# Altium PCB can.PcbDoc
Units mil, origin at the board's own origin, x right, y up, seen from the top; angles counter-clockwise.
Board outline 1875 x 875 mil, 2 copper layers (Top Layer, Bottom Layer); 22 components, 17 nets, 77 pads, 42 vias.
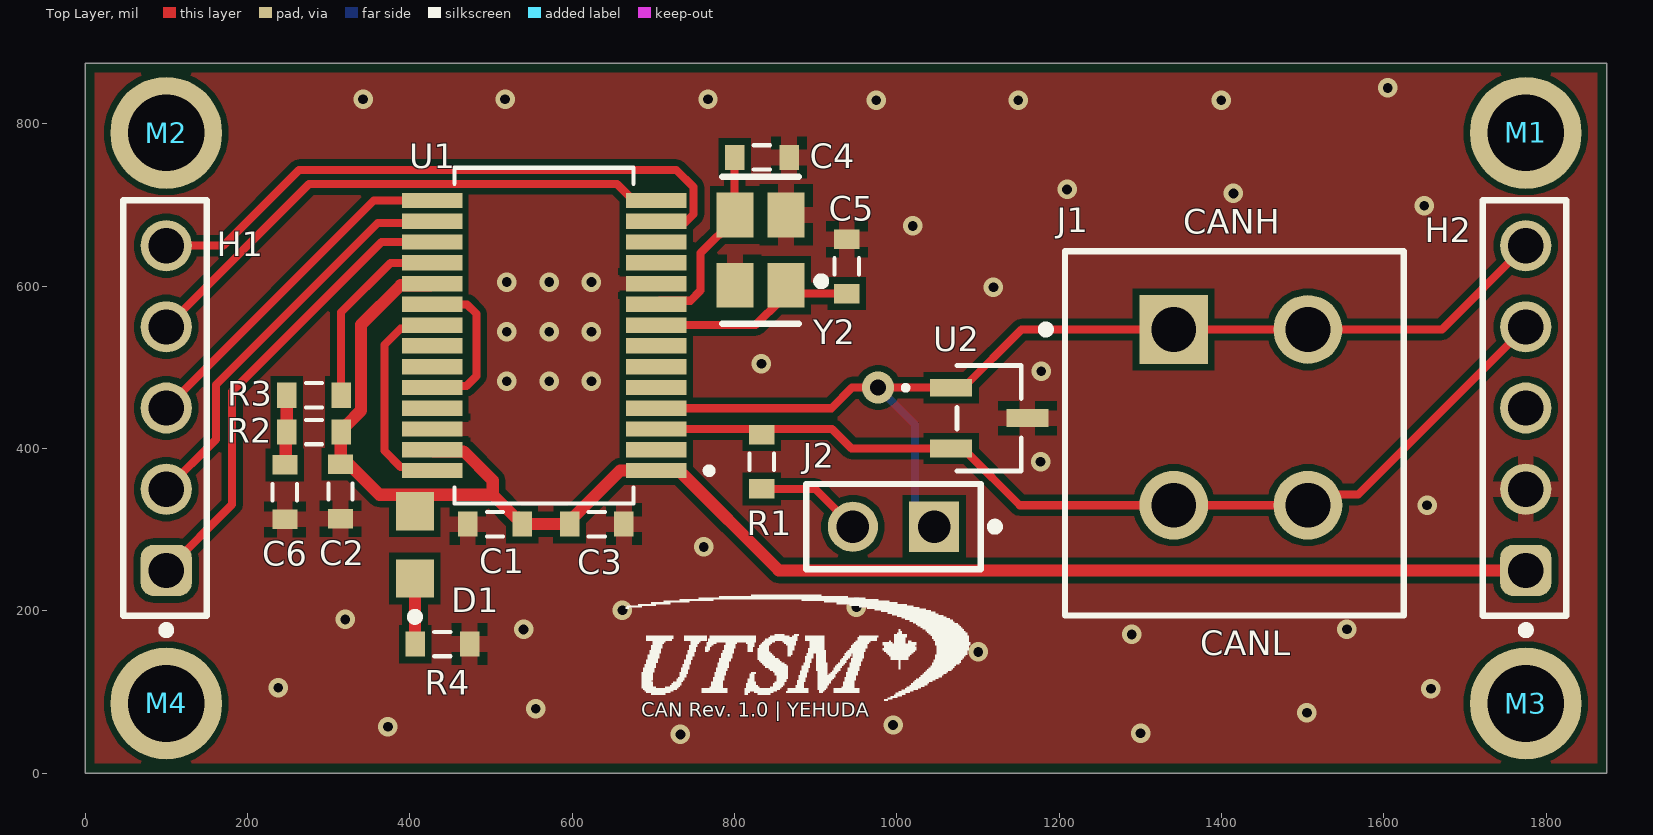
[diagram p0: Top Layer view]
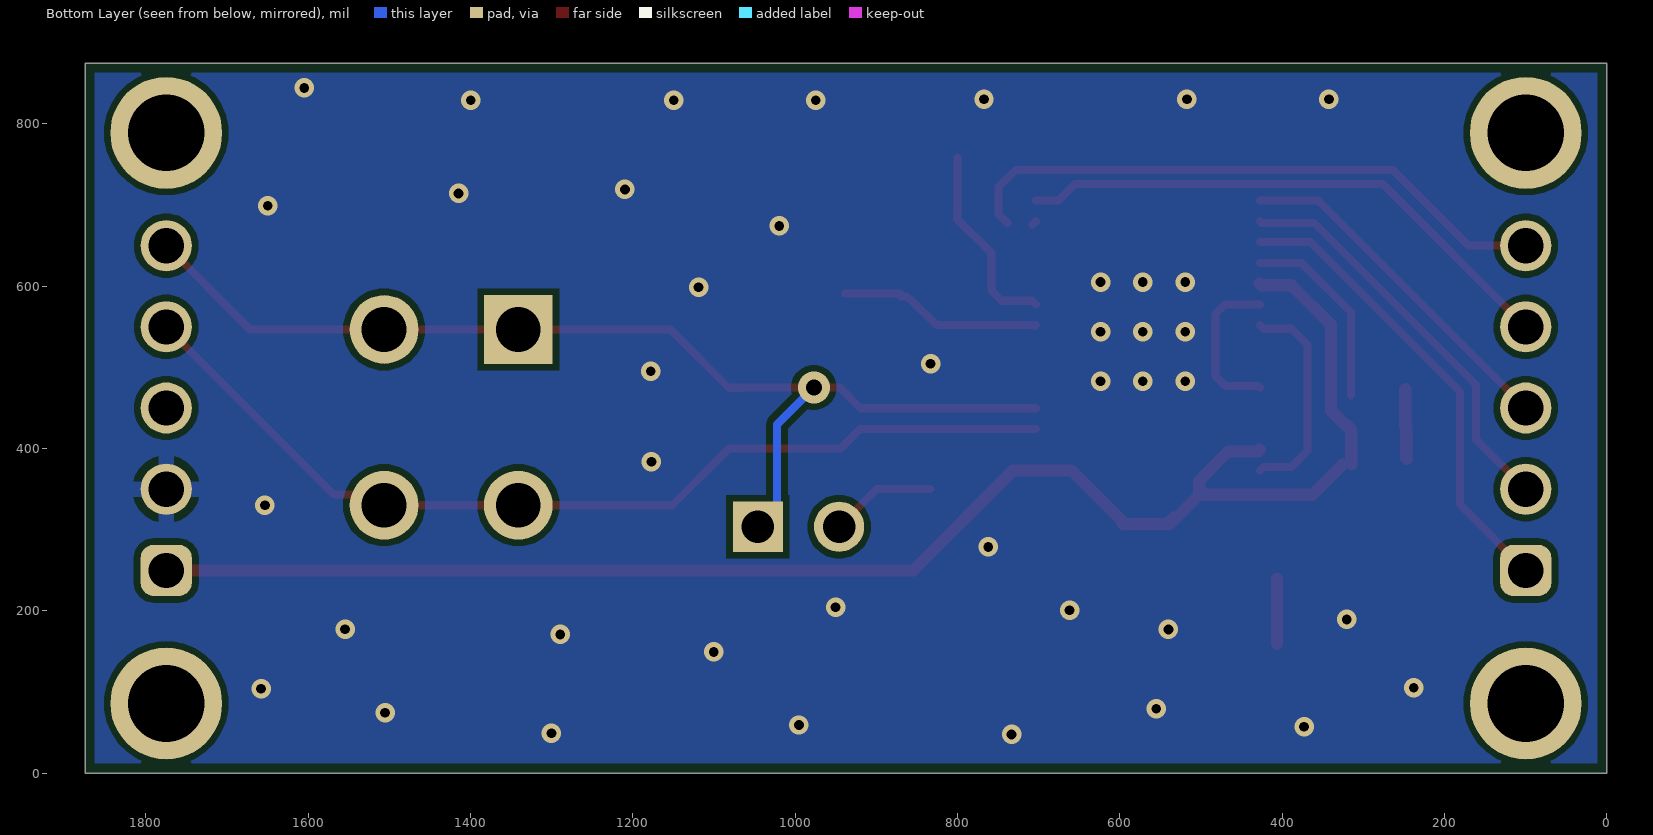
[diagram p1: Bottom Layer view, seen from below]
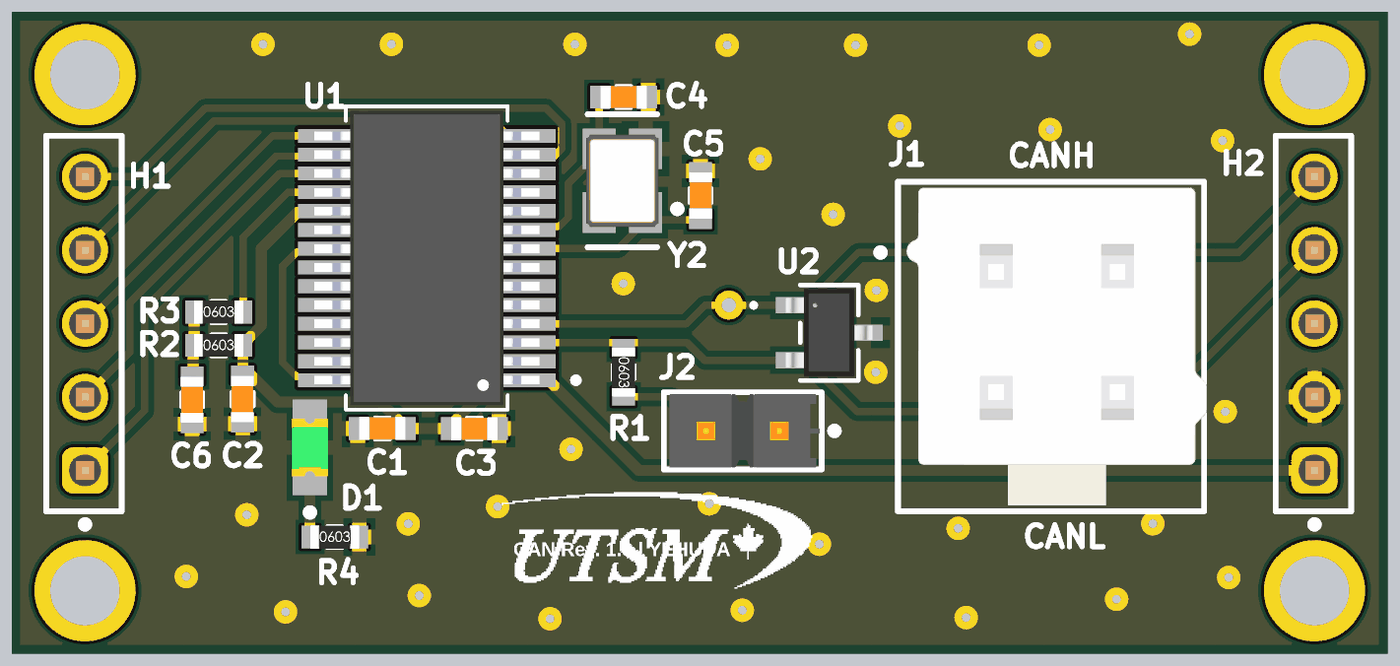
[diagram p2: 3D render of the assembled board from above, using the file's embedded part models]

## Layer stack, top to bottom
Top Solder: solder mask 0.4, Solder Resist, Dk 3.5
Top Layer: signal copper 1.4
Dielectric 1: dielectric 12.6, FR-4, Dk 4.8
Bottom Layer: signal copper 1.4
Bottom Solder: solder mask 0.4, Solder Resist, Dk 3.5

## Board outline
0,0 1875,0 1875,875 0,875

## Design rules (kind name [scope] priority, off if disabled: settings)
BoardOutlineClearance [All] p1: gap=11.81 ignorepadtopadclearanceinfootprint=FALSE except(15.75: Arc-SplitBarrior Arc-SplitContinuation Track-SplitBarrior Track-SplitContinuation SMDPad-SplitBarrior SMDPad-SplitContinuation THPad-SplitBarrior THPad-SplitContinuation Via-SplitBarrior Via-SplitContinuation Fill-SplitBarrior Fill-SplitContinuation Poly-SplitBarrior Poly-SplitContinuation Region-SplitBarrior Region-SplitContinuation Text-SplitBarrior Text-SplitContinuation)
Clearance "Clearance Different Nets" [All] p1: gap=7.87 ignorepadtopadclearanceinfootprint=FALSE except(3.5: Arc-Arc Arc-Track Arc-SMDPad Track-Track Track-SMDPad; 5: SMDPad-SMDPad SMDPad-Via THPad-Via Via-Via; 10: Arc-Via Arc-Text Track-Via Track-Text SMDPad-Text THPad-Text Via-Text Fill-Text Poly-Text Region-Text Text-Text; 19.68: THPad-THPad Via-Hole)
Clearance "Clearance Same Nets" [All] p2: gap=7.87 ignorepadtopadclearanceinfootprint=FALSE except(3.5: Arc-Arc Arc-Track Arc-SMDPad Track-Track Track-SMDPad SMDPad-SMDPad; 5: SMDPad-Via THPad-Via; 10: Arc-Via Arc-Text Track-Via Track-Text SMDPad-Text THPad-Text Via-Via Via-Text Fill-Text Poly-Text Region-Text Text-Text)
Clearance "Clearance Bottom Layer" [OnLayer('Bottom Layer')] p3: gap=8 ignorepadtopadclearanceinfootprint=TRUE except(10: Arc-Text Track-Text SMDPad-Text THPad-Text Via-Text Fill-Text Poly-Text Region-Text Text-Text)
Clearance "Clearance Top Layer" [OnLayer('Top Layer')] p4: gap=8 ignorepadtopadclearanceinfootprint=TRUE except(10: Arc-Text Track-Text SMDPad-Text THPad-Text Via-Text Fill-Text Poly-Text Region-Text Text-Text)
HoleSize [All] p1: absolutevalues=TRUE maxlimit=248.03 minlimit=7.87 maxpercent=80.000 minpercent=20.000
MinimumAnnularRing [All] p1: minimumring=5.12
MinimumSolderMaskSliver [All] p1: minsoldermaskwidth=3.94
PolygonConnect PolygonConnect_1 [All] p1: thpad.connectstyle=Relief thpad.reliefconductorwidth=20 thpad.reliefentries=4 thpad.polygonreliefangle="90 Angle" thpad.airgapwidth=10 smdpad.connectstyle=Relief smdpad.reliefconductorwidth=20 smdpad.reliefentries=4 smdpad.polygonreliefangle="90 Angle" smdpad.airgapwidth=10 via.connectstyle=Direct via.reliefconductorwidth=20 via.reliefentries=4 via.polygonreliefangle="90 Angle" via.airgapwidth=10
RoutingCorners [All] p1: cornerstyle=Round minsetback=100 maxsetback=100
RoutingVias [All] p1: holewidth=19.68 width=39.37 viastyle="Through Hole" minholewidth=7.87 minwidth=13.78 maxholewidth=39.37 maxwidth=78.74
SilkToSilkClearance [All] p1: silktosilkclearance=3.94
SilkToSolderMaskClearance [IsPad] p1: minsilkscreentomaskgap=3.94 clearancetoexposedcopper=TRUE
SolderMaskExpansion [All] p1: expansion=4 istentingtop=FALSE
SupplyNets "Schematic Supply Nets_1" [InNet('GND')] p1: voltage=0.000
SupplyNets "Schematic Supply Nets" [InNet('+5')] p2: voltage=0.000
Width [All] p1: maxlimit=100 minlimit=3.5 preferedwidth=15
25 further rules are at their usual default settings.

## Components (designator, comment, footprint, x,y, rotation, side; value= is the part's Value field where it differs from the comment)
C1 "Cap" 0603C 505.11,306.93 r0 top value=0.1uF
C2 "Cap" 0603C 314.69,347.11 r90 top value=0.1uF
C3 "Cap" 0603C 630.4,306.93 r180 top value=0.1uF
C4 "" 0603C 833.82,758.74 r180 top value=22pF
C5 "Cap" 0603C 938.51,624.5 r270 top value=22pF
C6 "Cap" 0603C 246.14,346.33 r90 top value=0.1uF
D1 "LTST-C171GKT" FP-LTST-C171GKT-MFG 406.4,281.3 r90 top
H1 "61300511121" 61300511121 100,450 r90 top
H2 "61300511121" 61300511121 1775,450 r90 top
J1 "1x4_FEMALE_VERT_THT" FP-0039281043-MFG 1423.92,446.4 r0 top
J2 "TSW-102-07-F-S" FP-TSW-102-07-F-S-MFG 996.03,303.77 r180 top
M1 "PTH-M2D5X5" PTH-M2D5X5#1 1775,794.7 r0 top
M2 "PTH-M2D5X5" PTH-M2D5X5#2 100,789.68 r0 top
M3 "PTH-M2D5X5" PTH-M2D5X5#3 1775,246.8 r0 top
M4 "PTH-M2D5X5" PTH-M2D5X5#3 100,246.8 r0 top
R1 "Res3" 0603R 833.7,383.76 r270 top value=120
R2 "Res3" 0603R 281.99,420.4 r0 top value=10k
R3 "Res3" 0603R 281.99,465.71 r0 top value=10k
R4 "Res3" 0603r 440.2,159.2 r0 top value=300
U1 "MCP25625-E/SS" SOP65P780X200-28N 565.66,539.32 r180 top
U2 "ESDCAN01-2BLY" SOT_01-2BLY_STM 1113.95,437.54 r270 top
Y2 "TSX-3225 16.0000MF09Z-AC0" FP-TSX-3225-MFG 832.13,644.57 r90 top

## Footprints (in the part's own frame and the unit in brackets; to place one, negate y for a bottom-side part, rotate by r counter-clockwise, add the part's x,y. Pads: shape width x height; smd on the part's side, far side on the other; paste and mask are expansions set on the pad)
0603C [mil]
  rect 24x31 smd: 1(-33.5,0) 2(33.5,0)
  silkscreen extent -10,-15 10,15, body extent -31,-15 31,16, height 31
0603R [mil]
  rect 24x31 smd: 1(-33.5,0) 2(33.5,0)
  silkscreen extent -10,-15 10,15, body extent -33,-16 33,16, height 22
0603r [mil]
  rect 24x31 smd: 1(-33.5,0) 2(33.5,0)
  silkscreen extent -10,-15 10,15, body extent -33,-16 33,16, height 22
61300511121 [mm] "Pin Header, pitch 2.54 mm, THT, Vertical, single row, 5p"
  rrect50% 1.6x1.6 hole 1.1: 1(-5.08,0)
  round 1.6 hole 1.1: 2(-2.54,0) 3(0,0) 4(2.54,0) 5(5.08,0)
  silkscreen extent -7.07,-1.27 6.5,1.35, body extent -6.35,-1.27 6.35,1.27, height 8.57
FP-0039281043-MFG [mm]
  rect 2.15x2.15 hole 1.4 paste-2539.97 mask+0: 1(-2.1,2.55)
  round 2.15 hole 1.4 paste-2539.97 mask+0: 2(2.1,2.55) 3(-2.1,-2.95) 4(2.1,-2.95)
  silkscreen extent -6.22,-6.4 5.1,5, body extent -5.6,-6.5 5.8,5.1, height 0.25
FP-LTST-C171GKT-MFG [mm]
  rect 1.2x1.2 smd paste+0 mask+0: 1(-1.05,0) 2(1.05,0)
  silkscreen extent -2.37,-0.13 -2.13,0.12, body extent -1.75,-0.77 1.75,0.77, height 0.25
FP-TSW-102-07-F-S-MFG [mm]
  rect 1.57x1.57 hole 1.02 paste-2539.97 mask+0: 1(-1.27,0)
  round 1.57 hole 1.02 paste-2539.97 mask+0: 2(1.27,0)
  silkscreen extent -3.3,-1.34 2.73,1.34, body extent -2.83,-1.44 2.83,1.44, height 0.25
FP-TSX-3225-MFG [mm]
  rect 1.4x1.15 smd paste+0 mask+0: 1(-1.1,-0.8) 2(1.1,-0.8) 3(1.1,0.8) 4(-1.1,0.8)
  silkscreen extent -2.3,-2.02 2.3,1.2, body extent -1.9,-1.48 1.9,1.48, height 0.25
PTH-M2D5X5#1 [mm]
  round 3.5 hole 2.4: 1(0,-0.145)
PTH-M2D5X5#2 [mm]
  round 3.5 hole 2.4: 1(0,-0.017)
PTH-M2D5X5#3 [mm]
  round 3.5 hole 2.4: 1(0,-4.084)
SOP65P780X200-28N [mm]
  rect 1.9x0.48 smd paste+0 mask+0.127: 1(-3.505,4.225) 2(-3.505,3.575) 3(-3.505,2.925) 4(-3.505,2.275) 5(-3.505,1.625) 6(-3.505,0.975) 7(-3.505,0.325) 8(-3.505,-0.325) 9(-3.505,-0.975) 10(-3.505,-1.625) 11(-3.505,-2.275) 12(-3.505,-2.925) 13(-3.505,-3.575) 14(-3.505,-4.225) 15(3.505,-4.225) 16(3.505,-3.575) 17(3.505,-2.925) 18(3.505,-2.275) 19(3.505,-1.625) 20(3.505,-0.975) 21(3.505,-0.325) 22(3.505,0.325) 23(3.505,0.975) 24(3.505,1.625) 25(3.505,2.275) 26(3.505,2.925) 27(3.505,3.575) 28(3.505,4.225)
  silkscreen extent -5.26,-5.25 2.8,5.25, body extent -3.9,-5.1 3.9,5.1, height 2
SOT_01-2BLY_STM [mil]
  rect 22x52 smd paste+0 mask+0: 1(-37.4,-47) 2(37.4,-47) 3(0,47)
  silkscreen extent -65,-106 65,40, body extent -60,-59 60,59, height 49

## Part data
C1: "0603 Capacitor", LatestRevisionDate=17-Jul-2002, LatestRevisionNote="Re-released for DXP Platform.", PackageDescription="Radial Cap, Thru-Hole; 2 Leads; 0.3 in Pin Spacing", PackageReference=RAD-0.3, Published=8-Jun-2000, Publisher="Altium Limited"
C2 C3 C5 C6: "SMD Capacitor", LatestRevisionDate=17-Jul-2002, LatestRevisionNote="Re-released for DXP Platform.", PackageDescription="Radial Cap, Thru-Hole; 2 Leads; 0.3 in Pin Spacing", PackageReference=RAD-0.3, Published=8-Jun-2000, Publisher="Altium Limited"
C4: library part Cap, "0603 Capacitor", LatestRevisionDate=17-Jul-2002, LatestRevisionNote="Re-released for DXP Platform.", PackageDescription="Radial Cap, Thru-Hole; 2 Leads; 0.3 in Pin Spacing", PackageReference=RAD-0.3, Published=8-Jun-2000, Publisher="Altium Limited"
D1: library part CMP-22017-000007-1, "LED GREEN CLEAR CHIP SMD", Case Code (Imperial)=0805, Case Code (Metric)=2012, Color=Green, Forward Current=30mA, Forward Voltage=2.1V, Lens Color=Colorless, Max Operating Temperature=85°C, Min Operating Temperature=-55°C, Package Quantity=1, Power Dissipation=100mW, Reverse Voltage=5V, Test Current=10mA, Case/Package=0805, Depth=1.25mm, Dominant Wavelength=569nm, Height=0.8mm, Illumination Color=Green, Lead Free="Lead Free", Length=2mm, Lens Style=Diffused, Lens Transparency=Clear, Luminous Intensity=12mcd, Mount="Surface Mount", Number of Elements=1, Number of LEDs=1, Number of Pins=2, Packaging="Tape and Reel", Power Rating=100mW, Radiation Hardening=No, Viewing Angle=130°, Wavelength=585nm, Width=1.25mm
H1 H2: "WR-PHD Pin Header, THT, Vertical, pitch 2.54mm, 1 Row, 5P", Contact Resistance=20mOhm, Manufacturer="Wurth Elektronik", Operating Temperature Max=105°C, Operating Temperature Min=-40°C, Rated Current=3A, Withstanding Voltage=500V, Working Voltage=250V, Category="Board-to-Board Connectors", ComponentLink1Description="Website Link", ComponentLink1URL=https://www.we-online.com/redexpert/article/61300511121?ad, ComponentLink2Description="Datasheet Link", ComponentLink2URL=https://www.we-online.com/redexpert/spec/61300511121?ad, Gender="Pin Header", Manufacturer Part Number=61300511121, Match Code=WR-PHD, Mount="Through Hole", Number of Pins=5, Number of Rows=1, Orientation=Vertical, Packaging=Bag, Pitch=2.54mm
J1: library part 1x4_FEMALE_POWER, "CONN HEADER VERT 4POS 4.2MM. 0039281043", Current Rating=9A, Manufacturer=Molex, Manufacturer Part Number=0039281043, Package=0, Temperature="-40°C to +105°C", Temperature Range High=+105°C, Temperature Range Low=-40°C, Voltage Rating=600V, Automotive=No, Category=Conn, ComponentLink2Description=Datasheet, ComponentLink2URL=https://www.molex.com/webdocs/datasheets/pdf/en-us/0039281043_PCB_HEADERS.pdf, Conn Gender=Male, Conn Orientation=Vertical, Contact Material=Tin, Device Class L1=Connectors, Device Class L2="Headers and Wire Housings", Device Class L3=unset, Digikey Description="CONN HEADER VERT 4POS 4.2MM", Footprint Url=https://www.molex.com/pdm_docs/sd/039281043_sd.pdf, Height=13.1mm, Lead Free=Yes, Number Of Contacts=4, Number of Rows=2, Octopart=https://octopart.com/39-28-1043-molex-7613, Pitch=4.2mm, RoHS=TRUE
J2: library part CMP-02766-001458-1, "CONN HEADER VERT 2POS 2.54MM", Color=Black, Flammability Rating="UL94 V-0", Max Current Rating=7.6A, Max Operating Temperature=125°C, Max Voltage Rating (AC)=550V, Min Operating Temperature=-55°C, Package Quantity=1, Connector Type=Header, Contact Finish - Mating=GOLD, Contact Material=Bronze, Contact Mating Length=0.23inch, Contact Plating=Gold, Contact Shape=Square, Contact Type="Male Pin", Depth=2.54mm, Fastening Type=Pull, Gender=Male, Housing Color=Black, Housing Material=Polyester, Insulation Color=Black, Insulation Material=PBT, Length=5.08mm, Mount="Through Hole", Number Of Contacts=2, Number of Positions=2, Number of Rows=1, Orientation=Straight, Packaging=Bulk, Pitch=2.54mm, Radiation Hardening=No, REACH SVHC="No SVHC", RoHS Compliant=Yes, Series=TSW, Termination=Solder
M1 M2 M3 M4: "M2 PTH (2.5mm), 5mm pad", Component Type=Mechanical, Pins=1
R1 R2 R3 R4: "SMD Resistor", LatestRevisionDate=29-May-2009, LatestRevisionNote="IPC-7351 Footprint Added.", PackageDescription="Chip Resistor", PackageReference=J1-0603, Published=8-Jun-2000, Publisher="Altium Limited"
U1: "1/1 Transceiver CANbus 28-SSOP", Package="SSOP-28 Microchip", Availability=Unavailable, MF=Microchip, MP=MCP25625-E/SS, Price=None, SnapEDA_Link=https://www.snapeda.com/parts/MCP25625-E/SS/Microchip/view-part/51329/?ref=snap
U2: Mfr_Name=STMicroelectronics, Copyright="Copyright (C) 2023 Ultra Librarian. All rights reserved.", Manufacturer_Part_Number=ESDCAN01-2BLY, RefDes=RefDes, Type=DEV
Y2: library part CMP-36405-000014-1, "CRYSTAL 16.0000MHZ 9PF SMD", Case/Package=SMD/SMT, ESR (Equivalent Series Resistance)=60R, Frequency=16MHz, Frequency Stability=9ppm, Frequency Tolerance=10ppm, Load Capacitance=9pF, Max Operating Temperature=75°C, Min Operating Temperature=-20°C, Package Quantity=1000, Drive Level=200uW, Height=0.024inch, Lead Free="Lead Free", Length=0.126inch, Mount="Surface Mount", Packaging="Tape and Reel", RoHS Compliant=Yes, Series=TSX-3225, Termination=SMD/SMT, Tolerance=10ppm, Weight=0.000564oz, Width=0.098inch

## Via types
v1: diameter 24, hole 12, Top Layer to Bottom Layer, 41 vias
v2: diameter 39.37, hole 19.68, Top Layer to Bottom Layer, 1 vias

## Nets (pads, with @x,y where several pads share a name; then routed paths per layer and width w, separated by ;. In a path a pad name is that pad's centre, name@x,y a point inside that pad or via, vN(x,y) a via of type N, cw(c..) or ccw(c..) an arc to the next point about the centre after c; other vN are vias at no path point)
+5: C1.2 C2.2 C3.2 D1.2 H2.1 R2.2 U1.1 U1.19 U1.27 | length 1969.6
  Top Layer w15: C2.2 315.09,381.01 315.09,420 R2.2 315.49,423.9 319.99,428.4 321.68,428.4 340.1,446.82 340.1,552.54 388.91,601.35 425.72,601.35 U1.19 ; C2.2@325.89,380.1 362.82,343.17 502.36,343.17 ; U1.27 429.62,396.62 466.44,396.62 502.36,360.7 502.36,343.17 ; C1.2@534.11,314.93 538.61,310.43 C1.2 ; H2.1 854.59,250 731.61,372.98 659.46,372.98 596.9,310.43 C3.2 C1.2 ; 502.36,343.17 C1.2
CANH: H2.5 J1.1 J1.2 J2.1 U1.4 U2.1 | length 1354.2
  Top Layer w10: U1.4 919.4,449.75 944.81,475.16 v2(977.12,475.16) ; v2@977.23,475.05 1066.84,475.05 U2.1 1081.95,474.94 1153.81,546.79 J1.2 1671.79,546.79 H2.5
  Bottom Layer w10: v2(977.12,475.16) 1022.63,429.66 1022.63,327.18 J2.1
CANL: H2.4 J1.3 J1.4 R1.1 U1.3 U2.2 | length 1201.4
  Top Layer w10: U1.3 920.03,424.16 944.06,400.14 U2.2 1081.95,400.14 1085.45,396.64 1085.45,396.38 1151.58,330.25 J1.4 1519.92,343.58 1568.58,343.58 H2.4
CS: H1.1 U1.17 | length 576.8
  Top Layer w10: H1.1 181.24,331.24 181.24,470.44 365.28,654.48 U1.17
GND: C1.1 C2.1 C3.1 C4.1 C5.1 C6.1 H2.2 R4.2 U1.10 U1.26 U2.3 Y2.2 Y2.4
  other v1: 733.5,47.9 1300.42,49.47 373.2,57.2 995.42,59.47 1505.42,74.47 555.42,79.47 1658.1,104.1 238.02,105.47 1100.42,149.47 1289.56,171 540.3,177.2 1554.72,177.3 320.42,189.47 662.1,200.7 950.42,204.47 762.2,278.8 1653.4,330.1 1177.27,383.76 519.69,482.84 571.76,482.84 623.83,482.84 1178.06,495.26 833.3,504.4 519.69,544.01 571.76,544.01 623.83,544.01 1119.2,598.7 519.69,605.18 571.76,605.18 623.83,605.18 1019.85,674.32 1649.85,699.32 1414.85,714.32 1209.85,719.32 974.85,829.32 1149.85,829.32 1399.85,829.32 342.48,830.5 517.48,830.5 767.48,830.5 1604.85,844.32
INT: H1.5 U1.13 | length 751.5
  Top Layer w10: H1.5 170.5,650 263.8,743.3 728.42,743.3 749.59,722.13 749.59,688.69 U1.13@738.7,677.8 ; U1.13 U1.13@707.62,676.1
MISO: H1.2 U1.16 | length 504
  Top Layer w10: H1.2 161.13,411.13 161.13,478.69 360.56,678.12 425.72,678.12 U1.16
MOSI: H1.3 U1.15 | length 433.6
  Top Layer w10: H1.3 355.66,705.66 U1.15
NetC6_2: C6.2 R2.1 R3.1 | length 86.9
  Top Layer w15: C6.2@246.14,387.31 247.32,388.49 247.32,426.71 248.49,427.88 R3.1@248.49,473.19
NetD1_1: D1.1 R4.1 | length 80.5
  Top Layer w15: R4.1@406.4,159.5 D1.1
NetJ2_2: J2.2 R1.2 | length 131.6
  Top Layer w10: R1.2 899.55,350.26 J2.2
OSC3: C4.2 U1.9 Y2.3 | length 243.4
  Top Layer w10: U1.9 708.11,582.16 745.78,582.16 758.45,594.83 758.45,640.78 800.63,682.96 Y2.3 800.32,688.19 C4.2
OSC4: C5.2 U1.8 Y2.1 | length 253.5
  Top Layer w10: U1.8@704.8,550.98 U1.8 826.09,552.12 857.29,583.31 863.68,587.38 870.08,587.38 870.8,591 C5.2
RESETB: R3.2 U1.18 | length 239.7
  Top Layer w10: R3.2 315.49,568.05 376.33,628.89 U1.18
RX: U1.21 U1.28 | length 268.4
  Top Layer w10: U1.28 423.22,377.43 388.77,377.43 368.8,397.4 368.8,527.89 388.58,547.67 423.22,547.67 U1.21
SCK: H1.4 U1.14 | length 685.1
  Top Layer w10: H1.4 276.11,726.11 655.25,726.11 675.7,705.66 U1.14
TX: U1.20 U1.24 | length 196.4
  Top Layer w10: U1.24 429.62,477.29 470.09,477.29 482.2,489.4 482.2,566.16 470.66,577.71 U1.20
pads on no net: H2.3 M1.1 M2.1 M3.1 M4.1 U1.2 U1.5 U1.6 U1.7 U1.11 U1.12 U1.22 U1.23 U1.25

## Polygon pours and split planes (outlines as drawn)
GND on Bottom Layer "GND" (solid, pour order 1): 4.73,870.35 1865,870.35 1865,4.73 4.73,4.73
GND on Top Layer "GND" (solid, remove dead copper, pour order 0): 4.73,870.35 1865,870.35 1865,4.73 4.73,4.73

## Silkscreen, mask and mechanical layers (free items; w line width, h text height)
Top Overlay:
  drawing of 7 lines, arcs and shapes, not listed
  text "CANH" at 1352.9,664.59 h30
  text "CANL" at 1373.79,145.69 h30
  text "CAN Rev. 1.0 | YEHUDA" at 685.4,63.5 h30
Mechanical 1:
  the board outline again, w10
Drill Drawing:
  text "Dimensions in mil unless specified otherwise" at 415.8,-464.1 h60

## Dimensions
1775,86 to 1875,0 on Drill Drawing
1775,789 to 1875,875 on Drill Drawing
1775,86 to 1775,789 on Drill Drawing
0,0 to 0,875 on Drill Drawing
100,789 to 0,875 on Drill Drawing
1775,789 to 1875,875 on Drill Drawing
100,789 to 1775,789 on Drill Drawing
0,0 to 1875,0 on Drill Drawing